# Altium PCB PCB1.PcbDoc
Units mm, origin at the board's own origin, x right, y up, seen from the top; angles counter-clockwise.
Board outline 152.4 x 101.6 mm, 2 copper layers (Top Layer, Bottom Layer); 37 components, 27 nets, 96 pads, 14 vias.
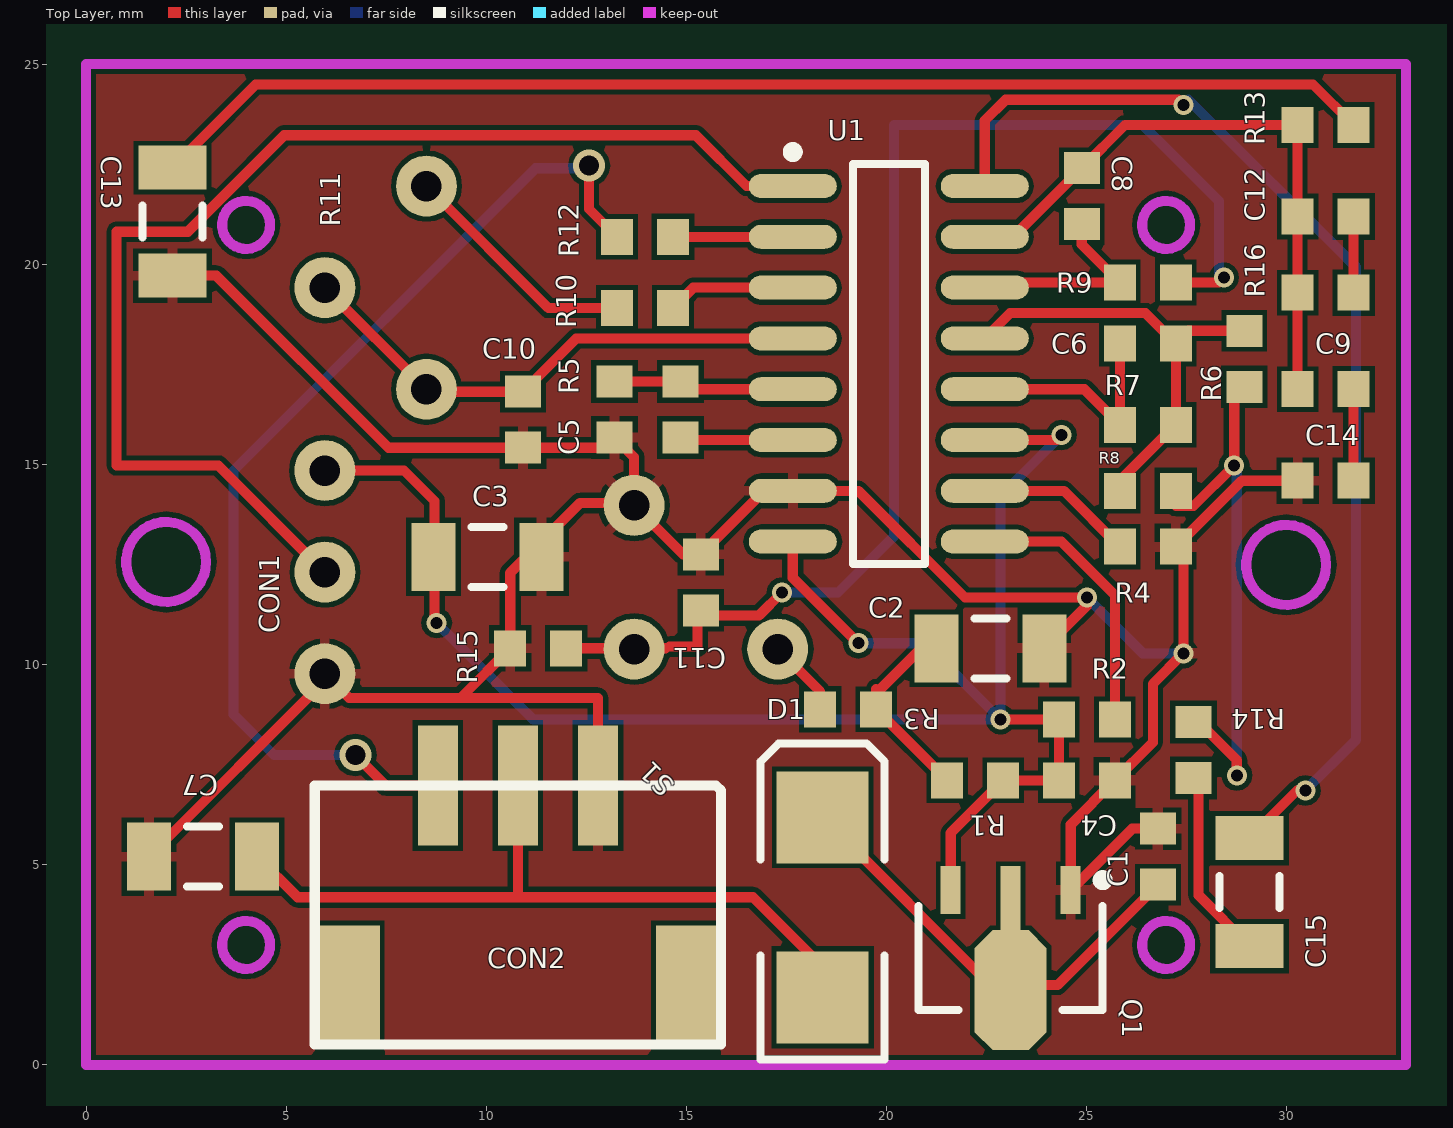
[diagram p0: Top Layer view]
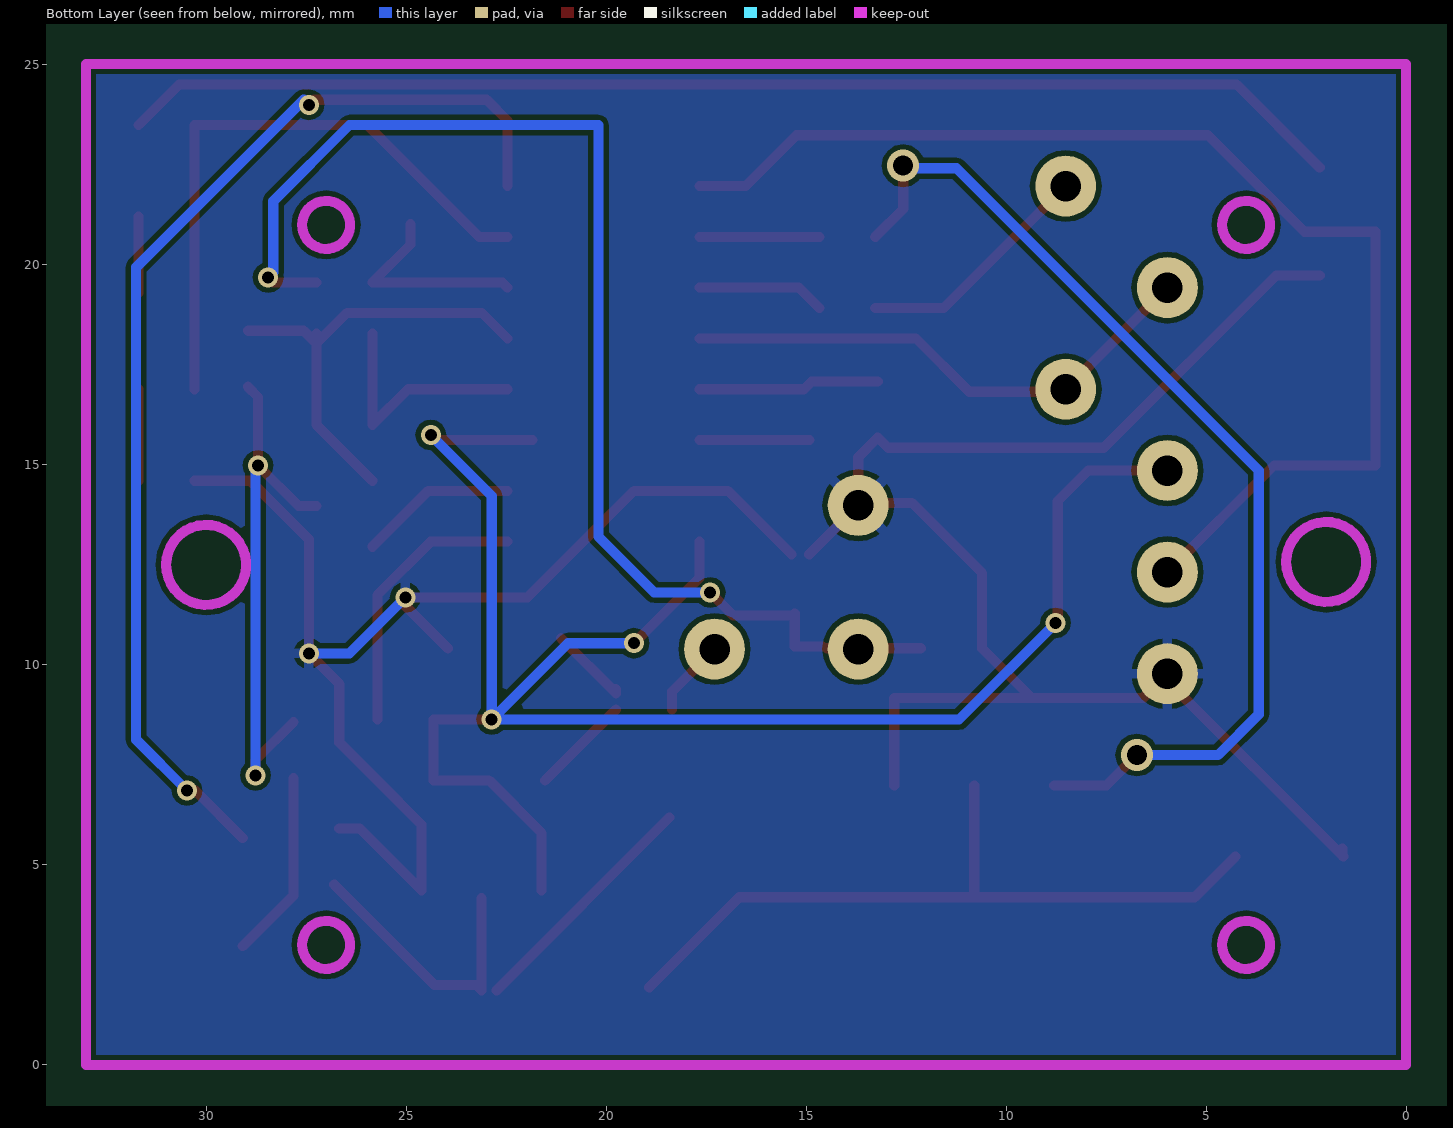
[diagram p1: Bottom Layer view, seen from below]

## Layer stack, top to bottom
Top Layer: signal copper 0.0356
Dielectric: dielectric 0.32, FR-4, Dk 4.8
Bottom Layer: signal copper 0.0356

## Board outline
-14.732,-54.483 137.668,-54.483 137.668,47.117 -14.732,47.117

## Design rules (kind name [scope] priority, off if disabled: settings)
Clearance [All] p1: gap=0.127
ComponentClearance [All] p1: gap=0 collisioncheckmode=3 verticalgap=0 showdistances=FALSE
PolygonConnect [All] p1: connectstyle=Relief reliefconductorwidth=0.254 reliefentries=4 polygonreliefangle="90 Angle"
RoutingVias [All] p1: holewidth=0.711 width=1.27 viastyle="Through Hole" minholewidth=0.711 minwidth=1.27 maxholewidth=0.711 maxwidth=1.27
SilkscreenOverComponentPads [All] p1: minsilkscreentomaskgap=0.254
SolderMaskExpansion [All] p1: expansion=0.102
Width [All] p1: maxlimit=0.254 minlimit=0.254 preferedwidth=0.254
26 further rules are at their usual default settings.

## Components (designator, comment, footprint, x,y, rotation, side; value= is the part's Value field where it differs from the comment)
C1 "Cap" 1608[0603] 26.797,5.207 r90 top
C2 "Cap Var" C1206 22.606,10.414 r0 top
C3 "Cap Var" C1206 10.033,12.7 r0 top
C4 "Cap" 1608[0603] 25.019,7.112 r180 top
C5 "Cap" 1608[0603] 13.208,16.383 r90 top
C6 "Cap" 1608[0603] 26.543,18.034 r180 top
C7 "Cap Var" C1206 2.921,5.207 r180 top
C8 "Cap" 1608[0603] 24.892,21.717 r270 top
C9 "Cap" 1608[0603] 30.988,16.891 r180 top
C10 "Cap" 1608[0603] 10.922,16.129 r90 top
C11 "Cap" 1608[0603] 15.367,12.065 r270 top
C12 "Cap" 1608[0603] 30.988,21.209 r180 top
C13 "Cap Var" C1206 2.159,21.082 r270 top
C14 "Cap" 1608[0603] 30.988,14.605 r0 top
C15 "Cap Var" C1206 29.083,4.318 r90 top
CON1 "Paizhen" Paizhen 5.969,12.319 r90 top
CON2 "sh-2.0" sh-2.0 10.795,6.985 r0 top
D1 "D Schottky" SMB 18.415,3.937 r90 top
Q1 "Diac-PNP" SOT89L 23.114,2.667 r270 top
R1 "Res2" 1608[0603] 22.225,7.112 r180 top
R2 "Res2" 1608[0603] 25.019,8.636 r0 top
R3 "Res2" 1608[0603] 19.05,8.89 r180 top
R4 "Res2" 1608[0603] 26.543,12.954 r0 top
R5 "Res2" 1608[0603] 14.859,16.383 r270 top
R6 "Res2" 1608[0603] 28.956,17.653 r270 top
R7 "Res2" 1608[0603] 26.543,16.002 r0 top
R8 "Res2" 1608[0603] 26.543,14.351 r0 top
R9 "Res2" 1608[0603] 26.543,19.558 r0 top
R10 "Res2" 1608[0603] 13.97,18.923 r0 top
R11 "Res Tap" R_change 8.509,19.431 r90 top
R12 "Res2" 1608[0603] 13.97,20.701 r0 top
R13 "Res2" 1608[0603] 30.988,23.495 r0 top
R14 "Res2" 1608[0603] 27.686,7.874 r270 top
R15 "Res2" 1608[0603] 11.303,10.414 r180 top
R16 "Res2" 1608[0603] 30.988,19.304 r0 top
S1 "DSG" DSG 15.494,12.192 r135 top
U1 "BIS0001" SO-16_N 20.066,17.526 r0 top

## Footprints (in the part's own frame and the unit in brackets; to place one, negate y for a bottom-side part, rotate by r counter-clockwise, add the part's x,y. Pads: shape width x height; smd on the part's side, far side on the other; paste and mask are expansions set on the pad)
1608[0603] [mm] "Chip Capacitor, Body 1.6x0.8mm, IPC High Density"
  rect 0.8x0.9 smd: 1(-0.7,0) 2(0.7,0)
  body extent -0.87,-0.48 0.87,0.48, height 1.3
C1206 [mm] "Chip Capacitor, Body 3.2x1.6mm, IPC High Density"
  rect 1.1x1.7 smd: 1(-1.35,0) 2(1.35,0)
  silkscreen extent -0.4,-0.75 0.4,0.75, body extent -1.7,-0.9 1.7,0.9, height 1.3
DSG [mil]
  round 60 hole 30: 1(-100,0) 2(0,100) 3(100,0)
Paizhen [mil]
  round 60 hole 30: 1(-100,0) 2(0,0) 3(100,0)
R_change [mil]
  round 60 hole 30: 1(-100,0) 2(100,0) 3(0,100)
sh-2.0 [mm]
  rect 1x3 smd: 1(-2,0) 2(0,0) 3(2,0)
  rect 1.5x3 smd: GND(-4.2,-5) GND(4.2,-5)
  silkscreen extent -5.08,-6.48 5.08,0
SMB [mm] "DO-214-AA/SMB; 2 C-Bend Leads; Body 5.3 x 3.6 mm, inc. leads (LxW)"
  rect 2.3x2.3 smd: 1(-2.25,0) 2(2.25,0)
  silkscreen extent -3.8,-1.55 4.1,1.55
SO-16_N [mm] "SOIC, 16-Leads, Body 9.9x3.9mm, Pitch 1.27mm, IPC Medium Density"
  oval 2.2x0.6 smd: 1(-2.4,4.445) 2(-2.4,3.175) 3(-2.4,1.905) 4(-2.4,0.635) 5(-2.4,-0.635) 6(-2.4,-1.905) 7(-2.4,-3.175) 8(-2.4,-4.445) 9(2.4,-4.445) 10(2.4,-3.175) 11(2.4,-1.905) 12(2.4,-0.635) 13(2.4,0.635) 14(2.4,1.905) 15(2.4,3.175) 16(2.4,4.445)
  silkscreen extent -2.52,-5 0.9,5.42, body extent -2,-5 2,5, height 1.75
SOT89L [mm] "SOT89, 3-Leads, Body 4.5x2.4 mm, Pitch 1.5mm, Lead Span 4.1mm, IPC High Density"
  rect 1.2x0.5 smd: 1(-1.7,1.5) 3(-1.7,-1.5)
  rect 1.6x0.5 smd: 2(-1.5,0)
  oct 3x1.8 smd: 2(0.8,0)
  silkscreen extent -2.07,-2.3 1.3,2.43, body extent -1.3,-2.3 1.3,2.3, height 1.6

## Part data
C1 C4 C5 C6 C8 C9 C10 C11 C12 C14: "Capacitor"
C2 C3 C7 C13 C15: "Variable or Adjustable Capacitor"
D1: "Schottky Diode"
Q1: "DIAC"
R1 R2 R3 R4 R5 R6 R7 R8 R9 R10 R12 R13 R14 R15 R16: "Resistor"
U1: library part BISS0001

## Via types
v1: diameter 0.5, hole 0.3, Top Layer to Bottom Layer, 12 vias
v2: diameter 0.8, hole 0.5, Top Layer to Bottom Layer, 2 vias

## Nets (pads, with @x,y where several pads share a name; then routed paths per layer and width w, separated by ;. In a path a pad name is that pad's centre, name@x,y a point inside that pad or via, vN(x,y) a via of type N, cw(c..) or ccw(c..) an arc to the next point about the centre after c; other vN are vias at no path point)
3.3V: C3.1 C4.2 CON1.3 Q1.3 R1.1 R2.1 U1.8 U1.11 | length 46.8
  Top Layer w0.254: CON1.3 7.948,14.859 8.71,14.097 v1@8.71,11.102 ; U1.8 17.666,12.179 v1(19.304,10.541) ; Q1.3 21.614,5.801 R1.1 C4.2 R2.1 v1(22.86,8.636) ; U1.11@21.844,15.621 U1.11 24.257,15.621 v1(24.384,15.748)
  Bottom Layer w0.254: v1(8.763,11.049) 11.176,8.636 v1(22.86,8.636) ; v1(19.304,10.541) 20.955,10.541 v1(22.86,8.636) ; v1@24.384,15.875 v1(24.384,15.748) 22.86,14.224 v1(22.86,8.636)
GND: C1.2 C2.2 C3.2 C4.1 C5.1 C7.2 C10.1 C11.1 C13.2 C14.1 CON1.1 CON2.3 Q1.1 R4.2 R15.2 S1.3 U1.7 | length 71.2
  Top Layer w0.254: C7.2 C7.2@1.598,5.234 ; C7.2@1.598,5.408 C7.2@1.598,5.234 ; C13.2 3.255,19.732 7.558,15.429 C10.1 12.954,15.429 C5.1 13.698,15.193 13.698,14.05 12.352,14.05 10.603,12.301 R15.2 9.398,9.209 ; CON1.1 5.969,9.605 C7.2@1.598,5.234 ; 6.508,9.24 6.572,9.176 12.795,9.176 CON2.3 ; S1.3 C11.1@14.921,12.765 ; C11.1 16.953,14.351 U1.7 19.304,14.351 21.971,11.684 v1(25.019,11.684) 25.019,11.477 C2.2 ; C1.2@26.67,5.907 26.154,5.907 Q1.1 24.614,6.007 C4.1 26.67,8.063 26.67,9.525 v1(27.432,10.287) 27.432,13.143 28.894,14.605 C14.1
  Bottom Layer w0.254: v1(25.019,11.684) 26.416,10.287 v1(27.432,10.287)
NetC1_1: C1.1 D1.2 Q1.2 | length 13.2
  Top Layer w0.254: D1.2 Q1.2@22.735,1.867 ; Q1.2@23.114,4.167 23.114,1.867 23.241,1.994 24.284,1.994 C1.1
NetC2_1: C2.1 R1.2 R3.1 | length 4.6
  Top Layer w0.254: R3.1@19.75,8.887 R1.2 ; 19.75,9.398 19.75,9.289 C2.1@21.129,10.668
NetC5_2: C5.2 R5.1 U1.5 | length 4.5
  Top Layer w0.254: C5.2 R5.1 15.051,16.891 U1.5
NetC6_1: C6.1 R6.1 R7.2 R8.1 U1.13 | length 11.5
  Top Layer w0.254: U1.13 23.101,18.796 26.481,18.796 C6.1 ; R8.1@25.843,14.602 R7.2 C6.1 ; C6.1@27.243,18.288 C6.1 ; R6.1 27.562,18.353 C6.1
NetC6_2: C6.2 R7.1 U1.12 | length 6
  Top Layer w0.254: U1.12 24.954,16.891 R7.1 C6.2 C6.2@25.843,18.288
NetC7_1: C7.1 CON2.2 D1.1 | length 18.8
  Top Layer w0.254: C7.1 5.287,4.191 10.795,4.191 ; CON2.2 10.795,4.191 ; D1.1@18.923,1.941 16.673,4.191 10.795,4.191
NetC8_1: C8.1 C9.2 C12.2 R13.1 R16.1 U1.15 | length 15.6
  Top Layer w0.254: U1.15 23.176,20.701 C8.1 25.97,23.495 R13.1 C12.2 R16.1 C9.2
NetC8_2: C8.2 R9.1 U1.14 | length 5.3
  Top Layer w0.254: U1.14 22.593,19.558 R9.1 24.892,20.509 C8.2
NetC9_1: C9.1 C14.2 | length 2.3
  Top Layer w0.254: C14.2 C9.1
NetC10_2: C10.2 R11.1 R11.3 U1.4 | length 13.2
  Top Layer w0.254: R11.3 R11.1 ; R11.1@8.571,16.829 C10.2 12.254,18.161 U1.4
NetC11_2: C11.2 R9.2 R15.1 S1.2 | length 31.8
  Top Layer w0.254: R15.1@12.13,10.414 14.478,10.414 ; 14.587,10.458 15.284,10.458 C11.2@15.284,11.282 ; C11.2@15.328,11.238 16.826,11.238 v1(17.399,11.811) ; R9.2 28.321,19.558 v1(28.448,19.685)
  Bottom Layer w0.254: v1(17.399,11.811) 18.796,11.811 20.193,13.208 20.193,23.495 26.416,23.495 28.321,21.59 v1@28.321,19.812
NetC12_1: C12.1 R16.2 | length 1.9
  Top Layer w0.254: R16.2 C12.1
NetC13_1: C13.1 R13.2 | length 30.8
  Top Layer w0.254: C13.1 4.238,24.511 30.672,24.511 R13.2
NetC15_1: C15.1 R14.2 | length 4.7
  Top Layer w0.254: R14.2@27.813,7.174 27.813,4.238 C15.1
NetC15_2: C15.2 U1.16 | length 28.1
  Top Layer w0.254: U1.16 22.466,23.609 22.987,24.13 v1@27.305,24.13 ; C15.2 30.273,6.858 v1(30.48,6.858)
  Bottom Layer w0.254: v1@27.559,24.13 31.75,19.939 31.75,8.128 v1(30.48,6.858)
  other v1: 27.432,24.003
NetCON1_2: CON1.2 U1.1 | length 30.6
  Top Layer w0.254: CON1.2 3.302,14.986 0.762,14.986 0.762,20.828 2.54,20.828 4.953,23.241 15.24,23.241 16.51,21.971 U1.1
NetCON2_3: CON2.1 R12.1 | length 26.1
  Top Layer w0.254: v2(6.731,7.747) 7.493,6.985 CON2.1 ; v2(12.573,22.479) 12.573,21.398 R12.1
  Bottom Layer w0.254: v2(6.731,7.747) 4.699,7.747 3.683,8.763 3.683,14.859 11.239,22.415 v2@12.636,22.415
NetR2_2: R2.2 U1.9 | length 6.9
  Top Layer w0.254: U1.9 24.384,13.081 25.719,11.746 R2.2
NetR3_2: R3.2 S1.1 | length 1.9
  Top Layer w0.254: S1.1 18.35,9.336 R3.2
NetR4_1: R4.1 U1.10 | length 4
  Top Layer w0.254: U1.10 24.446,14.351 R4.1
NetR5_2: R5.2 U1.6 | length 2.7
  Top Layer w0.254: R5.2@14.921,15.621 U1.6
NetR6_2: R6.2 R8.2 R14.1 | length 13.4
  Top Layer w0.254: R8.2@27.243,13.97 27.686,13.97 v1(28.702,14.986) 28.702,16.699 R6.2 ; R14.1@27.813,8.574 28.767,7.62 v1(28.767,7.239)
  Bottom Layer w0.254: v1(28.767,7.239) v1@28.767,14.986
NetR10_1: R10.1 R11.2 | length 6
  Top Layer w0.254: R11.2 11.557,18.923 R10.1
NetR10_2: R10.2 U1.3 | length 3.2
  Top Layer w0.254: R10.2 15.178,19.431 U1.3
NetR12_2: R12.2 U1.2 | length 3
  Top Layer w0.254: R12.2 U1.2
pads on no net: CON2.GND

## Polygon pours and split planes (outlines as drawn)
GND on Top Layer "Top Layer-No Net" (solid, pour order 2): 0,0.254 0,25.019 33,25.019 33,0
GND on Bottom Layer "Top Layer-No Net" (solid, pour order 4): 0,0 0,25 0.019,25.019 33,25.019 33,0 0,0

## Keep-outs
Keep-Out Layer:
  circle w0.254: c4,21 r0.6
  circle w0.254: c4,3 r0.6
  circle w0.254: c2,12.573 r1
  circle w0.254: c30,12.5 r1
  circle w0.254: c27,3 r0.6
  circle w0.254: c27,21 r0.6
  lines w0.254: 0,25 0,0 33,0 33,25.019 0,25.019